# Altium PCB attendance_SYS.PcbDoc
Units mm, origin at the board's own origin, x right, y up, seen from the top; angles counter-clockwise.
Board outline 43.05 x 83.82 mm, 2 copper layers (Top Layer, Bottom Layer); 27 components, 26 nets, 148 pads, 309 vias.
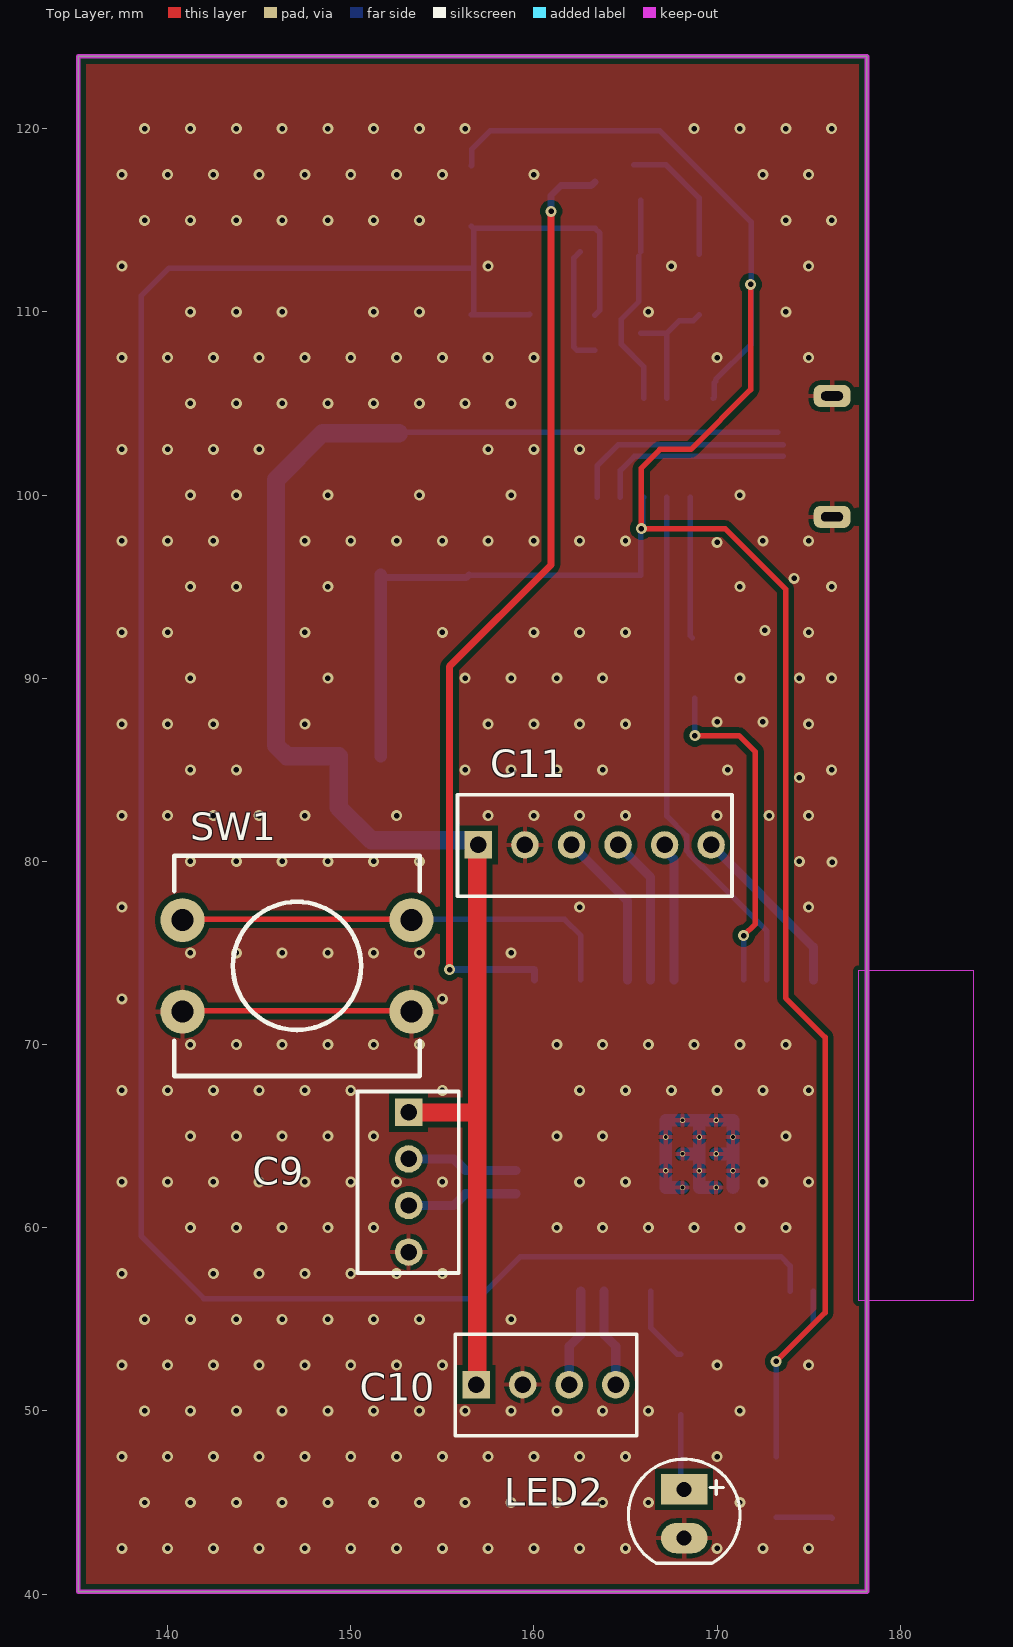
[diagram p0: Top Layer view]
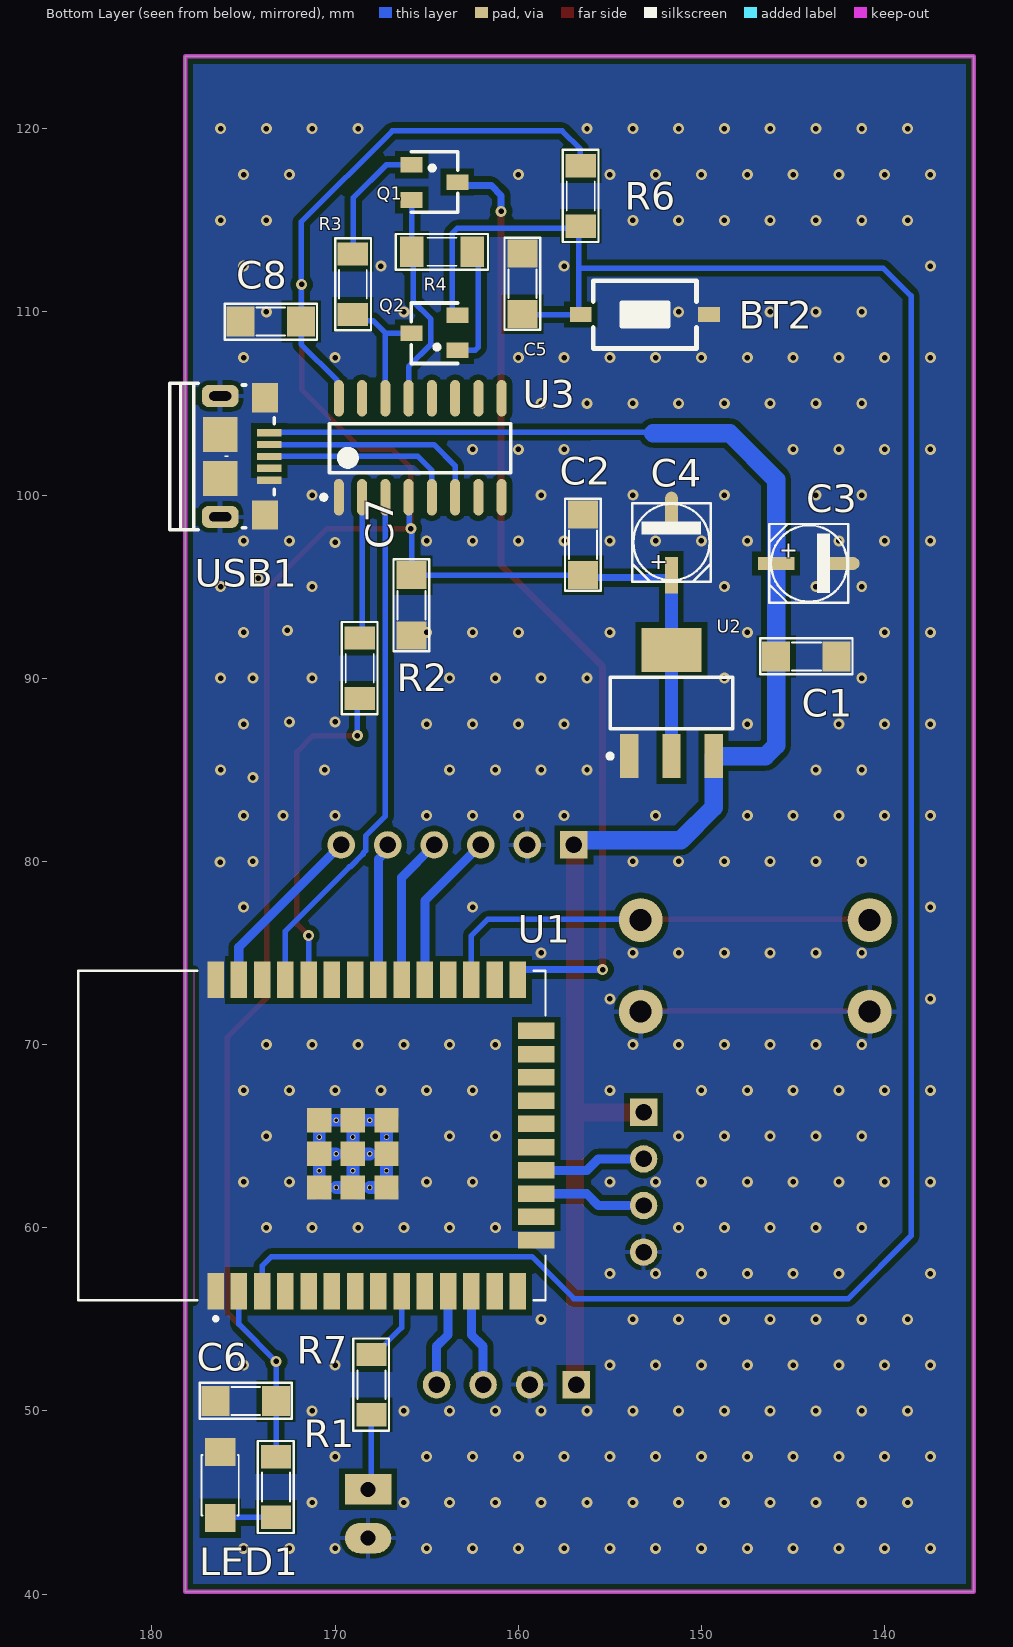
[diagram p1: Bottom Layer view, seen from below]
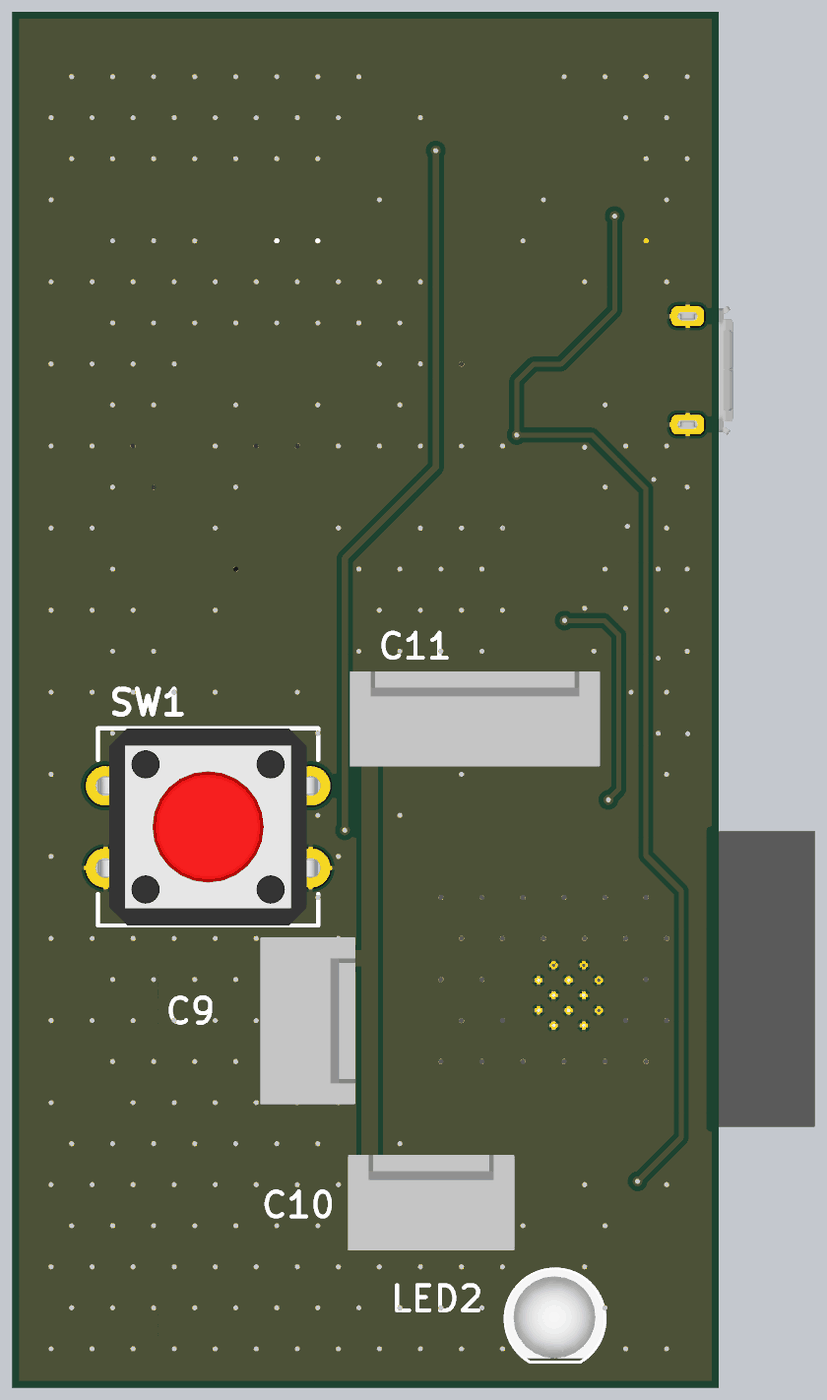
[diagram p2: 3D render of the assembled board from above, using the file's embedded part models]
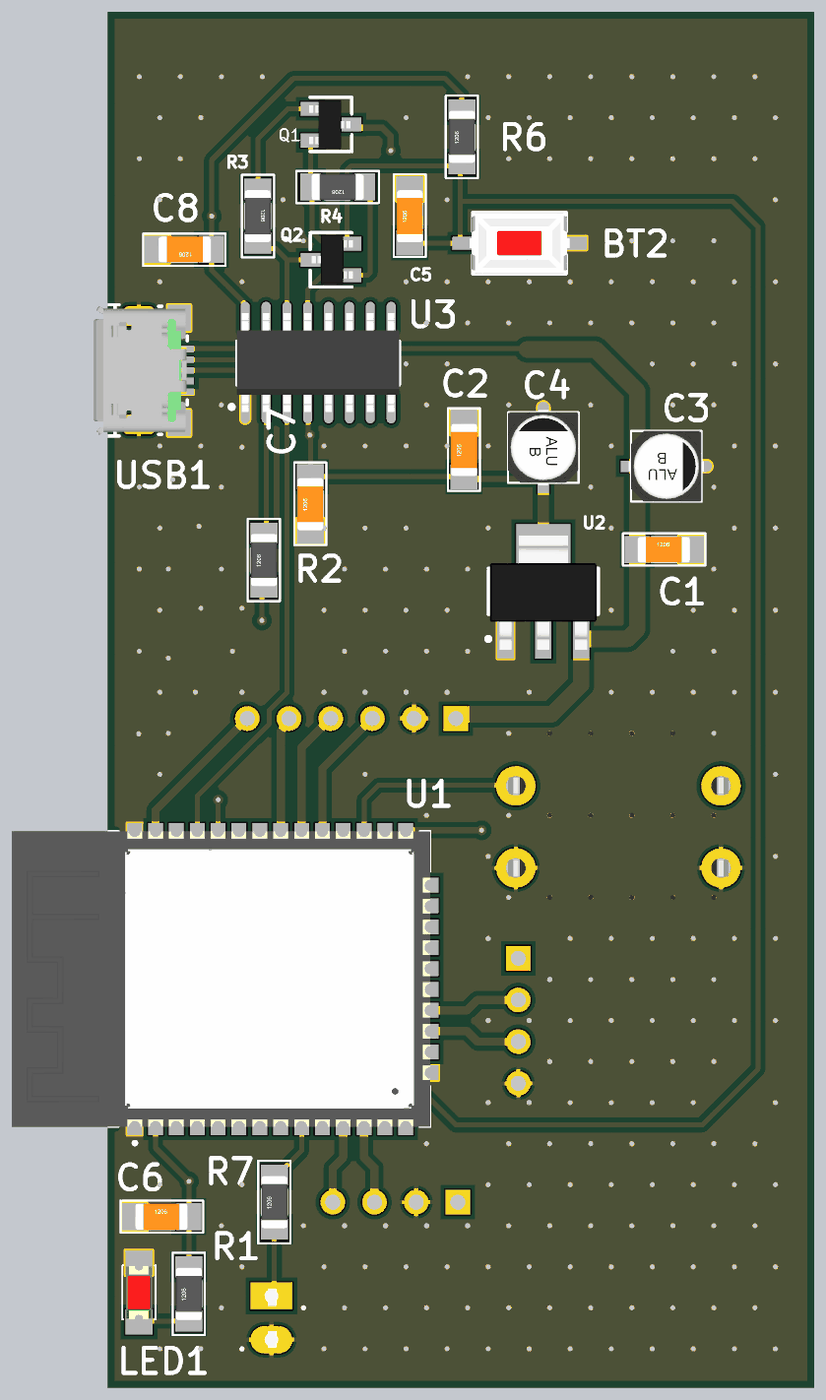
[diagram p3: 3D render of the assembled board from below, using the file's embedded part models]

## Layer stack, top to bottom
Top Solder: solder mask 0.0102, Solder Resist, Dk 3.5
Top Layer: signal copper 0.0356
Dielectric 1: dielectric 0.32, FR-4, Dk 4.8
Bottom Layer: signal copper 0.0356
Bottom Solder: solder mask 0.0102, Solder Resist, Dk 3.5

## Board outline
135.128,40.132 135.128,123.952 178.181,123.952 178.181,40.132

## Design rules (kind name [scope] priority, off if disabled: settings)
Clearance [All] p1: gap=0.3 ignorepadtopadclearanceinfootprint=TRUE
HoleToHoleClearance [All] p1: gap=0.12 allowstackedmicrovias=TRUE
MinimumSolderMaskSliver [All] p1: minsoldermaskwidth=0.12
PolygonConnect [All] p1: thpad.connectstyle=Relief thpad.reliefconductorwidth=0.254 thpad.reliefentries=4 thpad.polygonreliefangle="90 Angle" thpad.airgapwidth=0.254 smdpad.connectstyle=Direct smdpad.reliefconductorwidth=0.254 smdpad.reliefentries=4 smdpad.polygonreliefangle="90 Angle" smdpad.airgapwidth=0.254 via.connectstyle=Direct via.reliefconductorwidth=0.254 via.reliefentries=4 via.polygonreliefangle="90 Angle" via.airgapwidth=0.254
RoutingVias [All] p1: holewidth=0.711 width=1.27 viastyle="Through Hole" minholewidth=0.711 minwidth=1.27 maxholewidth=0.711 maxwidth=1.27
SilkToSilkClearance [All] p1: silktosilkclearance=0.12
SilkToSolderMaskClearance [IsPad] p1: minsilkscreentomaskgap=0.12 clearancetoexposedcopper=TRUE
SolderMaskExpansion [All] p1: expansion=0.102 istentingtop=FALSE
SupplyNets "Schematic Supply Nets_2" [InNet('GND')] p1: voltage=0.000
SupplyNets "Schematic Supply Nets_1" [InNet('+3.3')] p2: voltage=0.000
SupplyNets "Schematic Supply Nets" [InNet('+5')] p3: voltage=0.000
Width [All] p1: maxlimit=2.54 minlimit=0.254 preferedwidth=0.381
26 further rules are at their usual default settings.

## Components (designator, comment, footprint, x,y, rotation, side; value= is the part's Value field where it differs from the comment)
BT2 "Nut Nhan 2 Chan SMD 3x6x2.5" "Nut Nhan 2 Chan SMD 3x6x2.5" 153.091,109.855 r180 bottom
C1 "100n" CN-SMD-1206 144.298,91.186 r180 bottom value=33pF
C2 "100n" CN-SMD-1206 156.464,97.256 r90 bottom value=33pF
C3 "10u" CAP-ALU-SMD-5.5x5.5 144.145,96.266 r180 bottom
C4 "10u" CAP-ALU-SMD-5.5x5.5 151.638,97.409 r90 bottom
C5 "100n" CN-SMD-1206 159.766,111.506 r90 bottom value=33pF
C6 "100n" CN-SMD-1206 174.904,50.546 r180 bottom value=33pF
C7 "100n" CN-SMD-1206 165.824,93.955 r90 bottom value=33pF
C8 "100n" CN-SMD-1206 173.482,109.474 r0 bottom value=33pF
C9 "Header4" HDR4 153.162,66.294 r270 top
C10 "Header4" HDR4 156.845,51.435 r0 top
C11 "Header6" HDR6 156.972,80.899 r0 top
LED1 "LED" LED-1206-Red 176.276,44.145 r90 bottom value="LED 3 - 5 ly 2 Colour"
LED2 "LED" LED-5MM-GREEN 168.203,45.593 r270 top value="LED 3 ly Single Colour"
Q1 "s8050_smd" SOT-23 164.574,117.094 r270 bottom
Q2 "s8050_smd" SOT-23 164.569,108.839 r90 bottom
R1 "1k" RES-SMD-1206 173.228,45.847 r90 bottom
R2 "470" RES-SMD-1206 168.656,90.551 r90 bottom
R3 "10k" RES-SMD-1206 169.037,111.506 r270 bottom
R4 "10k" RES-SMD-1206 164.168,113.284 r0 bottom
R6 "470" RES-SMD-1206 156.591,116.332 r90 bottom
R7 "470" RES-SMD-1206 168.021,51.435 r90 bottom
SW1 "SW" SW1-DIP-12x12x8-Red 147.066,74.295 r0 top value="SW chip 2 pin"
U1 "ESP32-WROOM-32D-N4" MODULE_ESP32-WROOM-32D-N4 171.27,65.033 r90 bottom
U2 "LM1117-3.3V" SOT223 151.638,88.646 r180 bottom
U3 "CH340C" SO16 165.354,102.583 r90 bottom
USB1 "USB Micro 5p DIP" "USB Micro 5p DIP" 176.276,102.108 r270 bottom

## Footprints (in the part's own frame and the unit in brackets; to place one, negate y for a bottom-side part, rotate by r counter-clockwise, add the part's x,y. Pads: shape width x height; smd on the part's side, far side on the other; paste and mask are expansions set on the pad)
CAP-ALU-SMD-5.5x5.5 [mm]
  rect 2x0.7 smd: 1(-1.778,0)
  oval 2x0.7 smd: 2(1.778,0)
  silkscreen extent -2.15,-2.15 2.15,2.15, body extent -2.3,-2.15 2.3,2.15, height 5.4
CN-SMD-1206 [mil]
  rect 60x65 smd: 1(-64,0) 2(66,0)
  silkscreen extent -98,-38 100,39, body extent -63,-31 63,31, height 40
HDR4 [mm] "Connector; Header; 4 Position"
  rect 1.5x1.5 hole 0.9: 1(0,0)
  round 1.5 hole 0.9: 2(2.54,0) 3(5.08,0) 4(7.62,0)
  silkscreen extent -1.14,-2.79 8.76,2.74, body extent -1.27,-2.92 8.89,2.88, height 11.72
HDR6 [mm] "Connector; Header; 6 Position"
  rect 1.5x1.5 hole 0.9: 1(0,0)
  round 1.5 hole 0.9: 2(2.54,0) 3(5.08,0) 4(7.62,0) 5(10.16,0) 6(12.7,0)
  silkscreen extent -1.14,-2.79 13.84,2.74, body extent -1.27,-2.92 13.97,2.88, height 11.72
LED-5MM-GREEN [mil] "LED 2 PIN, 5 ly , Only colour,pin to pin 100mil"
  rect 65x100 hole 32: 1(-5,0)
  oval 65x100 hole 32: 2(100,0)
  silkscreen extent -70,-120 154,120, body extent -69,-120 145,117, height 339
LED-1206-Red [mil]
  rect 60x65 smd: 1(0,0) 2(142,0)
  silkscreen extent 6,-40 136,40, body extent 7,-31 133,31, height 43
MODULE_ESP32-WROOM-32D-N4 [mm]
  rect 2x0.9 smd: 1(-8.5,5.26) 2(-8.5,3.99) 3(-8.5,2.72) 4(-8.5,1.45) 5(-8.5,0.18) 6(-8.5,-1.09) 7(-8.5,-2.36) 8(-8.5,-3.63) 9(-8.5,-4.9) 10(-8.5,-6.17) 11(-8.5,-7.44) 12(-8.5,-8.71) 13(-8.5,-9.98) 14(-8.5,-11.25) 25(8.5,-11.25) 26(8.5,-9.98) 27(8.5,-8.71) 28(8.5,-7.44) 29(8.5,-6.17) 30(8.5,-4.9) 31(8.5,-3.63) 32(8.5,-2.36) 33(8.5,-1.09) 34(8.5,0.18) 35(8.5,1.45) 36(8.5,2.72) 37(8.5,3.99) 38(8.5,5.26)
  rect 0.9x2 smd: 15(-5.715,-12.25) 16(-4.445,-12.25) 17(-3.175,-12.25) 18(-1.905,-12.25) 19(-0.635,-12.25) 20(0.635,-12.25) 21(1.905,-12.25) 22(3.175,-12.25) 23(4.445,-12.25) 24(5.715,-12.25)
  rect 1.33x1.33 smd: 39_1(-2.835,-0.405) 39_2(-1,-0.405) 39_3(0.835,-0.405) 39_4(-2.835,-2.24) 39_5(-1,-2.24) 39_6(0.835,-2.24) 39_7(-2.835,-4.075) 39_8(-1,-4.075) 39_9(0.835,-4.075)
  round 0.3 hole 0.2: 39_10(-1.918,-0.405) 39_11(-0.083,-0.405) 39_12(-2.835,-1.323) 39_13(-1,-1.323) 39_14(0.835,-1.323) 39_15(-1.918,-2.24) 39_16(-0.083,-2.24) 39_17(-2.835,-3.158) 39_18(-1,-3.158) 39_19(0.835,-3.158) 39_20(-1.918,-4.075) 39_21(-0.083,-4.075)
  Keep-Out Layer region: 9,6.45 -9,6.45 -9,12.75 9,12.75
  silkscreen extent -10.1,-12.75 9,12.75, body extent -9,-12.75 9,12.75, height 3.25
"Nut Nhan 2 Chan SMD 3x6x2.5" [mm] "Switch SMD type"
  rect 1.2x0.8 smd: 1(-3.5,0) 2(3.5,0)
  silkscreen extent -2.82,-1.85 2.82,1.85, body extent -3.05,-1.85 3.05,1.85, height 2.5
RES-SMD-1206 [mil]
  rect 50x65 smd: 1(-65,0) 2(65,0)
  silkscreen extent -99,-38 99,39, body extent -63,-31 63,32, height 40
SO16 [mm] "SOIC, 16-Leads, Body 9.90x3.91mm, Pitch 1.27mm, IPC Medium Density"
  oval 2x0.55 smd: 1(-2.7,4.445) 2(-2.7,3.175) 3(-2.7,1.905) 4(-2.7,0.635) 5(-2.7,-0.635) 6(-2.7,-1.905) 7(-2.7,-3.175) 8(-2.7,-4.445) 9(2.7,-4.445) 10(2.7,-3.175) 11(2.7,-1.905) 12(2.7,-0.635) 13(2.7,0.635) 14(2.7,1.905) 15(2.7,3.175) 16(2.7,4.445)
  silkscreen extent -2.82,-4.95 1.3,5.4, body extent -3,-4.95 3,4.95, height 1.4
SOT223 [mm]
  rect 1x2.4 smd: 1(-2.3,-2.9) 2(0,-2.9) 3(2.3,-2.9)
  rect 3.3x2.4 smd: 4(0,2.9)
  silkscreen extent -3.48,-3.02 3.35,1.4, body extent -3.25,-3.56 3.25,3.4, height 1.68
SOT-23 [mm] "SOT 23 _ 1-3-2"
  rect 0.85x1.2 smd: 1(-0.94,-1.245) 2(0.985,-1.25) 3(0.005,1.25)
  silkscreen extent -1.65,-1.27 1.65,1.27, body extent -1.47,-1.33 1.53,1.17, height 1.06
SW1-DIP-12x12x8-Red [mm] "SW button 4pin, 12x12mm"
  round 2.4 hole 1.2: 1(-6.25,2.5) 1(6.25,2.5) 2(-6.25,-2.5) 2(6.25,-2.5)
  silkscreen extent -6.71,-6.01 6.71,6.01, body extent -6.71,-6.01 6.71,6.01, height 7.87
"USB Micro 5p DIP" [mm]
  rect 0.4x1.35 smd mask+0.05: 1(-1.3,2.675) 2(-0.65,2.675) 3(0,2.675) 4(0.65,2.675) 5(1.3,2.675)
  rrect60% 1.2x2 hole 0.5 slot 1.2 at 90 deg: 5(-3.3,0) 5(3.3,0)
  rect 1.6x1.4 smd: 5(-3.2,2.45) 5(3.2,2.45)
  rect 1.9x1.9 smd paste-10: 5(-1.2,0) 5(1.2,0)
  silkscreen extent -4,-2.75 4,2.95, body extent -3.93,-2.76 3.93,2.9, height 2.84

## Part data
C1 C2 C5 C6 C7 C8: library part CN
C3 C4: library part CN-SMD, "Polarized Capacitor (Axial)", LatestRevisionDate=17-Jul-2002, LatestRevisionNote="Re-released for DXP Platform.", PackageReference=POLAR0.8, Published=8-Jun-2000, Publisher="Altium Limited"
C9 C10: "Header IDC, 4 x 1 Pin Vertical 2.54mm Pitch (Non-Boxed, Male)", Manufacturer="W¨¹rth Elektronik eiSos GmbH", partNo=613002143121, ComponentLink1 Description=Manufacturer, ComponentLink1URL=http://www.we-online.com, ComponentLink2 Description=Datasheet, ComponentLink2URL=http://katalog.we-online.de/em/datasheet/6130xx143121.pdf, Created by="Karrer Zheng", Created Date="29 March 2013", NoPins=02
C11: "Header IDC, 6 x 1 Pin Vertical 2.54mm Pitch (Non-Boxed, Male)", Manufacturer="W¨¹rth Elektronik eiSos GmbH", partNo=613002143121, ComponentLink1 Description=Manufacturer, ComponentLink1URL=http://www.we-online.com, ComponentLink2 Description=Datasheet, ComponentLink2URL=http://katalog.we-online.de/em/datasheet/6130xx143121.pdf, Created by="Karrer Zheng", Created Date="29 March 2013", NoPins=02
LED1: library part "LED SMD"
LED2: "LED Single colour Green and Red"
Q1 Q2: "Bipolar (BJT) Transistor NPN 25 V 500 mA 150MHz 300 mW Surface Mount SOT-23", Package=None, Availability="In Stock", Check_prices=https://www.snapeda.com/parts/S8050/Umwelt+Sensor+Teknik/view-part/?ref=eda, MF=UMW, MP=S8050, Price=None, Purchase-URL=https://pricing.snapeda.com/search/part/S8050/?ref=eda, SnapEDA_Link=https://www.snapeda.com/parts/S8050/Umwelt+Sensor+Teknik/view-part/?ref=snap
R1 R2 R3 R4 R6 R7: library part Res-SMD, "Resistor", Manufacturer="Generic Components", Class=Passive, Published=08/06/2000, Publisher="Altium Hobart Technology Centre"
SW1: library part SW2, "Switch button 2 pin"
U1: "Bluetooth, WiFi 802.11b/g/n, Bluetooth v4.2 +EDR, Class 1, 2 and 3 Transceiver Module 2.4GHz ~ 2.5GHz Integrated, Trace Surface Mount", Package="Non Standard Espressif Systems", Check_prices=https://www.snapeda.com/parts/ESP32-WROOM-32D-N4/Espressif+Systems/view-part/?ref=eda, MF="Espressif Systems", MP=ESP32-WROOM-32D-N4, SnapEDA_Link=https://www.snapeda.com/parts/ESP32-WROOM-32D-N4/Espressif+Systems/view-part/?ref=snap
U2: library part LM1117, "800mA Low-Dropout Linear Regulator", Creator="Nguyen Ba Bien", Website=http://group3i.net
U3: "High and Low Side Driver", ComponentLink1Description="Manufacturer Link", ComponentLink1URL=http://www.irf.com/, ComponentLink2Description=Datasheet, ComponentLink2URL=http://www.irf.com/product-info/datasheets/data/ir2110.pdf, DatasheetVersion=PD60147J, LatestRevisionDate=04-Mar-2005, LatestRevisionNote="Stylized 3D Model Added.", Note="Pins 4, 8 and 14 are not connected", PackageDescription="DIP; 14 Leads; Row Spacing 7.62 mm; Pitch 2.54 mm", PackageReference=PDIP14, Published=8-Jun-2000, Publisher="Altium Limited"
USB1: "USB Type B", Ma_Hang=MH005145, Ten="MicroUSB MK5P DIP"
BT2: Ma_Hang=MH001036, Ten="Nút Nhấn 2 Chân 3x6x2.5MM SMD"

## Via types
v1: diameter 0.6, hole 0.3, Top Layer to Bottom Layer, tented both sides, 309 vias

## Nets (pads, with @x,y where several pads share a name; then routed paths per layer and width w, separated by ;. In a path a pad name is that pad's centre, name@x,y a point inside that pad or via, vN(x,y) a via of type N, cw(c..) or ccw(c..) an arc to the next point about the centre after c; other vN are vias at no path point)
+3.3: C2.1 C4.1 C6.2 C7.2 C8.1 R1.2 R6.2 U1.2 U2.2 U2.4 U3.4 U3.16 | length 137.7
  Top Layer w0.3: v1(171.831,111.506) 171.831,105.756 168.564,102.489 166.878,102.489 165.862,101.473 v1(165.862,98.171) 170.434,98.171 173.736,94.869 173.736,72.546 175.895,70.387 175.895,55.372 v1(173.228,52.705)
  Bottom Layer w0.3: C2.1 C7.2 165.824,98.133 v1(165.862,98.171) 165.862,98.252 165.951,98.342 165.951,99.845 U3.4 ; R6.2 156.611,118.003 156.611,118.892 157.607,119.888 166.878,119.888 171.857,114.909 C8.1 171.857,108.23 169.924,106.297 169.924,106.201 169.847,106.123 169.847,105.331 U3.16 ; R1.2 C6.2 v1(173.228,52.705) 175.26,54.737 U1.2
  Bottom Layer w0.381: C4.1 151.779,95.49 156.323,95.49 C2.1
  Bottom Layer w0.7: U2.2 U2.4 C4.1
+5: C1.1 C3.1 C9.1 C10.1 C11.1 U2.3 USB1.1 | length 91.2
  Top Layer w1: C9.1 156.909,66.294 ; C10.1 156.909,51.498 156.909,66.294 ; C11.1 156.909,80.835 156.909,66.294
  Bottom Layer w0.3: 152.63,103.378 152.69,103.438 156.04,103.438 USB1.1@173.315,103.438
  Bottom Layer w1: 152.63,103.378 148.463,103.378 145.923,100.838 C3.1 C1.1 145.923,86.332 146.509,85.746 U2.3 149.338,82.945 151.13,81.153 156.136,81.153 156.14,81.149 156.722,81.149 C11.1
CS: C11.3 U1.29 | length 8.6
  Bottom Layer w0.5: C11.3 165.1,77.851 U1.29
D+: U3.5 USB1.3 | length 10.7
  Bottom Layer w0.3: U3.5 164.719,101.346 165.481,102.108 USB1.3
D-: U3.6 USB1.2 | length 12.3
  Bottom Layer w0.3: U3.6 163.449,101.6 164.607,102.758 USB1.2
EN: BT2.1 C5.1 Q2.2 R6.1 U1.3 | length 129.1
  Bottom Layer w0.3: BT2.1 BT2.1@156.713,109.855 ; R6.1 R6.1@156.713,114.559 ; C5.1 159.74,109.855 BT2.1@156.713,109.855 ; Q2.2 163.327,109.825 163.602,110.1 163.602,114.296 163.338,114.559 R6.1@156.713,114.559 ; U1.3 173.99,57.912 173.484,58.418 159.256,58.418 156.972,56.134 141.986,56.134 138.557,59.563 138.557,110.871 140.081,112.395 156.713,112.395 ; BT2.1@156.713,109.855 156.713,112.395 ; 156.713,112.395 R6.1@156.713,114.559
GND: BT2.2 C1.2 C2.2 C3.2 C4.2 C5.2 C6.1 C7.1 C8.2 C9.4 C10.2 C11.2 LED1.2 LED2.2 SW1.2 U1.1 U1.15 U1.38 U1.39_1 U1.39_2 U1.39_3 U1.39_4 U1.39_5 U1.39_6 U1.39_7 U1.39_8 U1.39_9 U1.39_10 U1.39_11 U1.39_12 U1.39_13 U1.39_14 U1.39_15 U1.39_16 U1.39_17 U1.39_18 U1.39_19 U1.39_20 U1.39_21 U2.1 U3.1 USB1.5 | length 30.8
  Top Layer w0.3: SW1.2@140.789,71.835 SW1.2@153.289,71.835
  Bottom Layer w0.7: U1.39_17 U1.39_7 U1.39_20 U1.39_8 U1.39_21 U1.39_9 U1.39_19 U1.39_6 ; U1.39_18 U1.39_5 ; U1.39_12 U1.39_4 U1.39_15 U1.39_5 ; U1.39_13 U1.39_2 ; U1.39_1 U1.39_10 U1.39_2 ; U1.39_5 U1.39_16 U1.39_6 ; U1.39_6 U1.39_14 U1.39_3 U1.39_11 U1.39_2
  other v1: 137.5,42.5 140,42.5 142.5,42.5 145,42.5 147.5,42.5 150,42.5 152.5,42.5 155,42.5 157.5,42.5 160,42.5 162.5,42.5 165,42.5 170,42.5 172.5,42.5 175,42.5 138.75,45 141.25,45 143.75,45 146.25,45 148.75,45 151.25,45 153.75,45 156.25,45 158.75,45 161.25,45 163.75,45 166.25,45 171.25,45 137.5,47.5 140,47.5 142.5,47.5 145,47.5 147.5,47.5 150,47.5 152.5,47.5 155,47.5 157.5,47.5 160,47.5 162.5,47.5 165,47.5 170,47.5 138.75,50 141.25,50 143.75,50 146.25,50 148.75,50 151.25,50 153.75,50 156.25,50 158.75,50 161.25,50 163.75,50 166.25,50 171.25,50 137.5,52.5 140,52.5 142.5,52.5 145,52.5 147.5,52.5 150,52.5 152.5,52.5 155,52.5 170,52.5 175,52.5 138.75,55 141.25,55 143.75,55 146.25,55 148.75,55 151.25,55 153.75,55 158.75,55 137.5,57.5 142.5,57.5 145,57.5 147.5,57.5 150,57.5 152.5,57.5 155,57.5 141.25,60 143.75,60 146.25,60 148.75,60 151.25,60 161.25,60 163.75,60 166.25,60 168.75,60 171.25,60 173.75,60 137.5,62.5 140,62.5 142.5,62.5 145,62.5 147.5,62.5 150,62.5 152.5,62.5 155,62.5 162.5,62.5 165,62.5 172.5,62.5 175,62.5 141.25,65 143.75,65 146.25,65 148.75,65 151.25,65 161.25,65 163.75,65 173.75,65 137.5,67.5 140,67.5 142.5,67.5 145,67.5 147.5,67.5 150,67.5 155,67.5 162.5,67.5 165,67.5 167.5,67.5 170,67.5 172.5,67.5 175,67.5 141.25,70 143.75,70 146.25,70 148.75,70 151.25,70 153.75,70 161.25,70 163.75,70 166.25,70 168.75,70 171.25,70 173.75,70 137.5,72.5 155,72.5 141.25,75 143.75,75 146.25,75 148.75,75 151.25,75 153.75,75 158.75,75 137.5,77.5 162.5,77.5 175,77.5 176.285,79.965 141.25,80 143.75,80 146.25,80 148.75,80 151.25,80 153.75,80 174.486,80 137.5,82.5 140,82.5 142.5,82.5 145,82.5 147.5,82.5 152.5,82.5 157.5,82.5 160,82.5 162.5,82.5 165,82.5 170,82.5 172.835,82.5 175,82.5 174.486,84.571 141.25,85 143.75,85 156.25,85 158.75,85 161.25,85 163.75,85 170.573,85 176.25,85 137.5,87.5 140,87.5 142.5,87.5 147.5,87.5 157.5,87.5 160,87.5 162.5,87.5 165,87.5 175,87.5 170,87.618 172.5,87.618 141.25,90 148.75,90 156.25,90 158.75,90 161.25,90 163.75,90 171.25,90 174.486,90 176.25,90 137.5,92.5 140,92.5 147.5,92.5 155,92.5 160,92.5 162.5,92.5 165,92.5 175,92.5 172.61,92.61 141.25,95 143.75,95 148.75,95 171.25,95 176.25,95 174.208,95.458 170,97.421 137.5,97.5 140,97.5 142.5,97.5 147.5,97.5 150,97.5 152.5,97.5 155,97.5 157.5,97.5 160,97.5 162.5,97.5 165,97.5 172.5,97.5 175,97.5 141.25,100 143.75,100 148.75,100 153.75,100 158.75,100 171.25,100 137.5,102.5 140,102.5 142.5,102.5 145,102.5 157.5,102.5 160,102.5 162.5,102.5 141.25,105 143.75,105 146.25,105 148.75,105 151.25,105 153.75,105 156.25,105 158.75,105 137.5,107.5 140,107.5 142.5,107.5 145,107.5 147.5,107.5 150,107.5 152.5,107.5 155,107.5 157.5,107.5 160,107.5 170,107.5 175,107.5 141.25,110 143.75,110 146.25,110 151.25,110 153.75,110 166.25,110 173.75,110 137.5,112.5 157.5,112.5 167.5,112.5 175,112.5 138.75,115 141.25,115 143.75,115 146.25,115 148.75,115 151.25,115 153.75,115 173.75,115 176.25,115 137.5,117.5 140,117.5 142.5,117.5 145,117.5 147.5,117.5 150,117.5 152.5,117.5 155,117.5 160,117.5 172.5,117.5 175,117.5 138.75,120 141.25,120 143.75,120 146.25,120 148.75,120 151.25,120 153.75,120 156.25,120 168.75,120 171.25,120 173.75,120 176.25,120
I00: Q1.3 U1.25 | length 52.4
  Top Layer w0.381: v1(155.397,74.092) 155.397,90.653 160.934,96.19 v1(160.934,115.494)
  Bottom Layer w0.381: v1(155.397,74.092) 160.02,74.092 U1.25 ; v1(160.934,115.494) 160.934,116.357 161.472,116.895 163.13,116.895 Q1.3
led: R7.2 U1.9 | length 4.2
  Bottom Layer w0.3: U1.9 166.37,54.547 167.831,53.086 R7.2
MISO: C11.5 U1.31 | length 7.6
  Bottom Layer w0.5: C11.5 167.132,80.628 167.64,80.12 U1.31
MOSI: C11.6 U1.37 | length 9.7
  Bottom Layer w0.5: C11.6 175.26,75.311 U1.37
NetLED1_1: LED1.1 R1.1 | length 3.1
  Bottom Layer w0.3: R1.1 176.225,44.196 LED1.1
NetLED2_1: LED2.1 R7.1 | length 4.1
  Bottom Layer w0.3: R7.1 168.021,45.902 LED2.1
NetQ1_1: Q1.1 R3.1 | length 7.4
  Bottom Layer w0.3: Q1.1@165.456,118.034 Q1.1 167.208,118.034 169.014,116.228 R3.1@169.014,113.157
NetQ1_2: Q1.2 R4.2 U3.13 | length 11.5
  Bottom Layer w0.3: R4.2@165.735,113.03 165.735,110.576 164.769,109.61 164.769,108.233 165.989,107.013 U3.13 ; R4.2 165.824,113.289 Q1.2
NetQ2_1: Q2.1 R4.1 | length 6.6
  Bottom Layer w0.3: R4.1 162.179,112.946 162.179,108.075 162.355,107.899 Q2.1
NetQ2_3: Q2.3 R3.2 U3.14 | length 7.1
  Bottom Layer w0.3: Q2.3 165.994,108.844 167.259,108.844 167.937,109.522 168.704,109.522 R3.2 ; U3.14 167.259,108.788
NetR2_2: R2.2 U3.2 | length 7.7
  Bottom Layer w0.3: U3.2 168.529,92.329 R2.2
RX: C9.3 U1.17 | length 6.1
  Bottom Layer w0.5: C9.3 155.629,61.214 156.273,61.858 U1.17
RX0: R2.1 U1.34 | length 18.4
  Top Layer w0.3: v1(168.783,86.868) 171.196,86.868 172.085,85.979 172.085,76.581 v1(171.45,75.946)
  Bottom Layer w0.3: v1(168.783,86.868) 168.783,88.876 R2.1@168.783,88.9 ; U1.34 v1(171.45,75.946)
SCK: C11.4 U1.30 | length 8.1
  Bottom Layer w0.5: C11.4 166.37,79.121 U1.30
SCL: C10.3 U1.12 | length 5.4
  Bottom Layer w0.5: C10.3 161.925,53.527 162.56,54.162 U1.12
SDA: C10.4 U1.11 | length 5.4
  Bottom Layer w0.5: U1.11 163.83,54.162 164.465,53.527 C10.4
SW: SW1.1 U1.27 | length 24.6
  Top Layer w0.3: SW1.1@140.789,76.835 SW1.1@153.289,76.835
  Bottom Layer w0.3: SW1.1@153.289,76.835 161.671,76.835 162.56,75.946 U1.27
TX: C9.2 U1.18 | length 6.1
  Bottom Layer w0.5: C9.2 155.638,63.754 156.264,63.128 U1.18
TX0: U1.35 U3.3 | length 28.6
  Bottom Layer w0.3: U3.3 167.259,82.469 168.332,81.396 168.332,80.588 168.472,80.448 168.472,80.402 169.175,79.699 169.221,79.699 172.72,76.2 U1.35
pads on no net: U1.4 U1.5 U1.6 U1.7 U1.8 U1.10 U1.13 U1.14 U1.16 U1.19 U1.20 U1.21 U1.22 U1.23 U1.24 U1.26 U1.28 U1.32 U1.33 U1.36 U3.7 U3.8 U3.9 U3.10 U3.11 U3.12 U3.15 USB1.4

## Polygon pours and split planes (outlines as drawn)
GND on Bottom Layer "GND_L02_P000" (solid, pour order 0): 135.128,40.132 135.128,123.952 178.181,123.952 178.181,40.132
GND on Top Layer "GND_L01_P001" (solid, pour order 1): 135.128,40.132 135.128,123.952 178.181,123.952 178.181,40.132

## Keep-outs
Keep-Out Layer:
  the board outline again, w0.254

## Text inside footprints (layer, text, board x,y; h text height)
C3: Bottom Overlay "+" at 145.745,96.591 h0.89
C4: Bottom Overlay "+" at 151.963,95.809 h0.89 r270
U1: Mechanical 13 "ANTENNA" at 180.27,59.033 h1.78 r270